# Altium PCB golden_arduino.PcbDoc
Units mil, origin at the board's own origin, x right, y up, seen from the top; angles counter-clockwise.
Board outline 3900 x 3000 mil, 2 copper layers (Top Layer, Bottom Layer); 61 components, 45 nets, 259 pads, 36 vias.
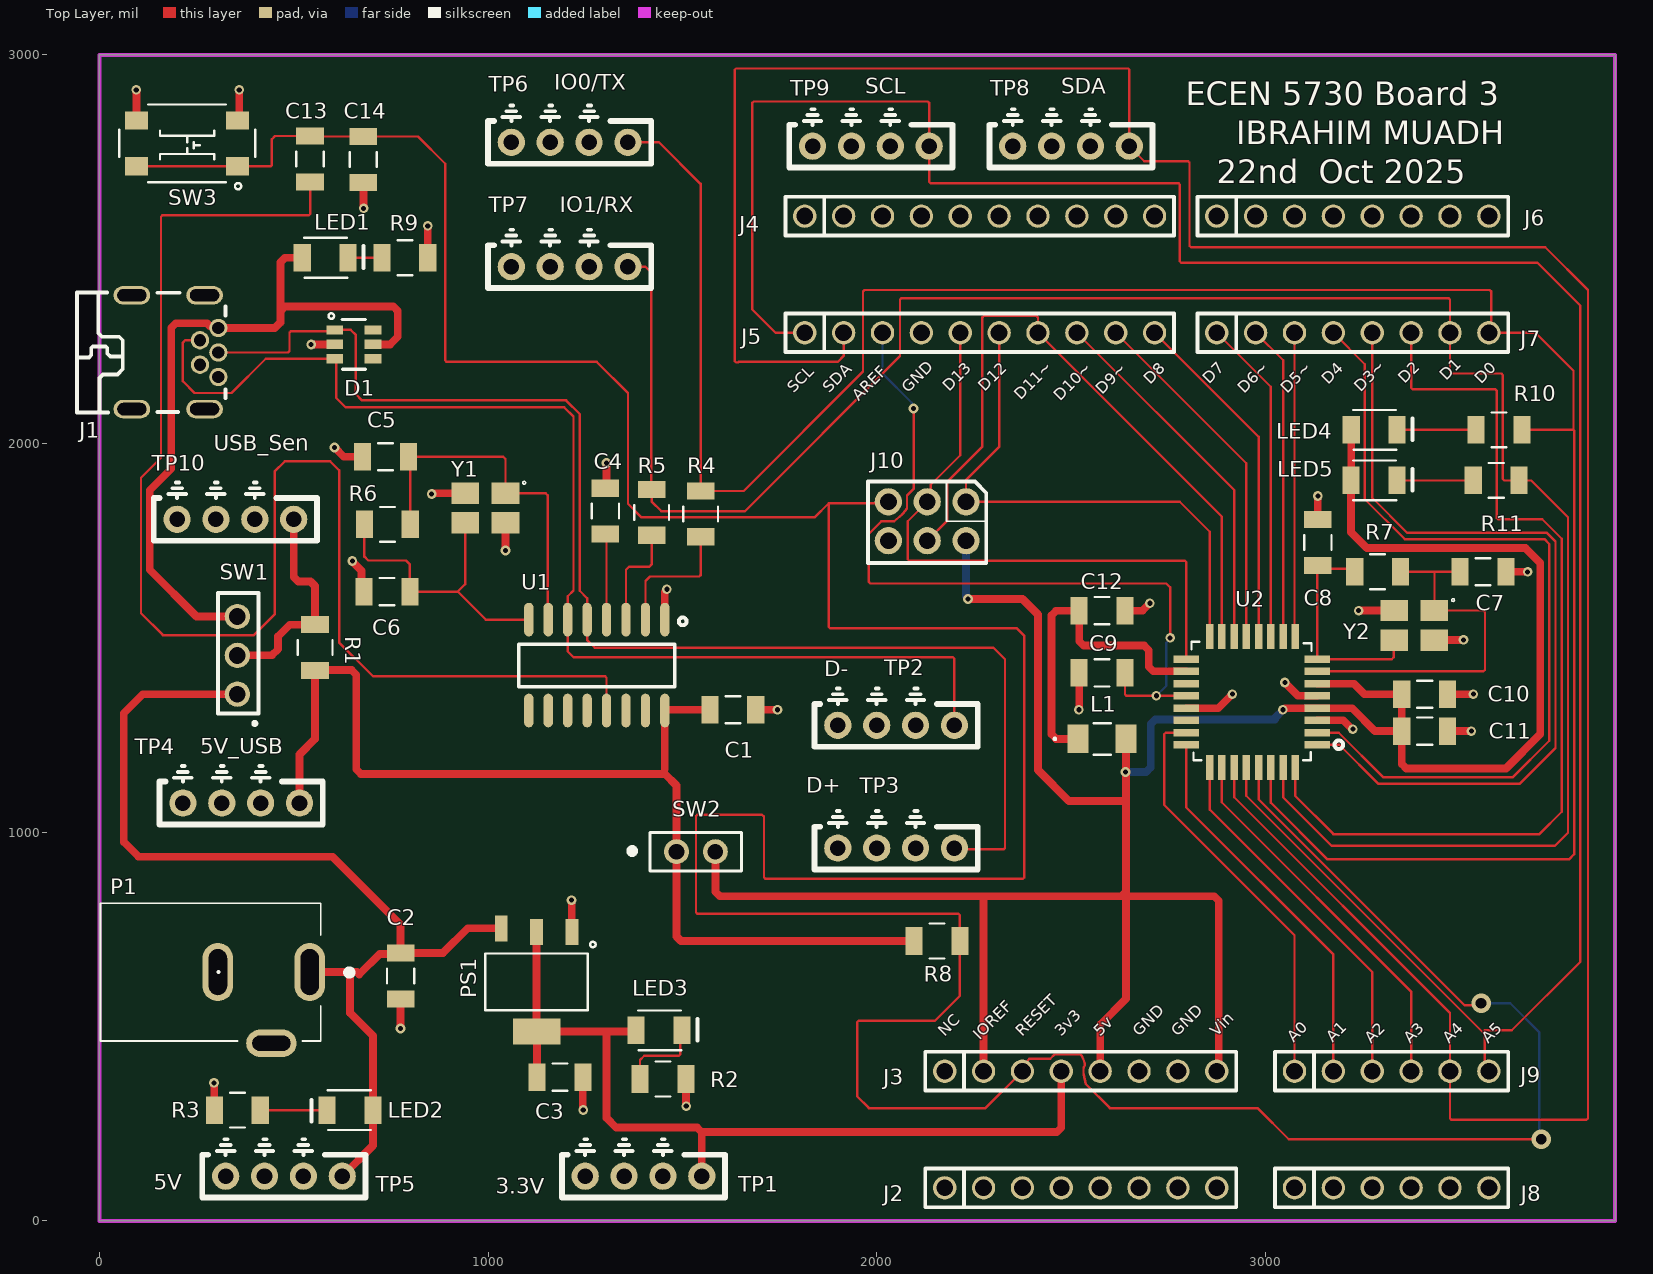
[diagram p0: Top Layer view]
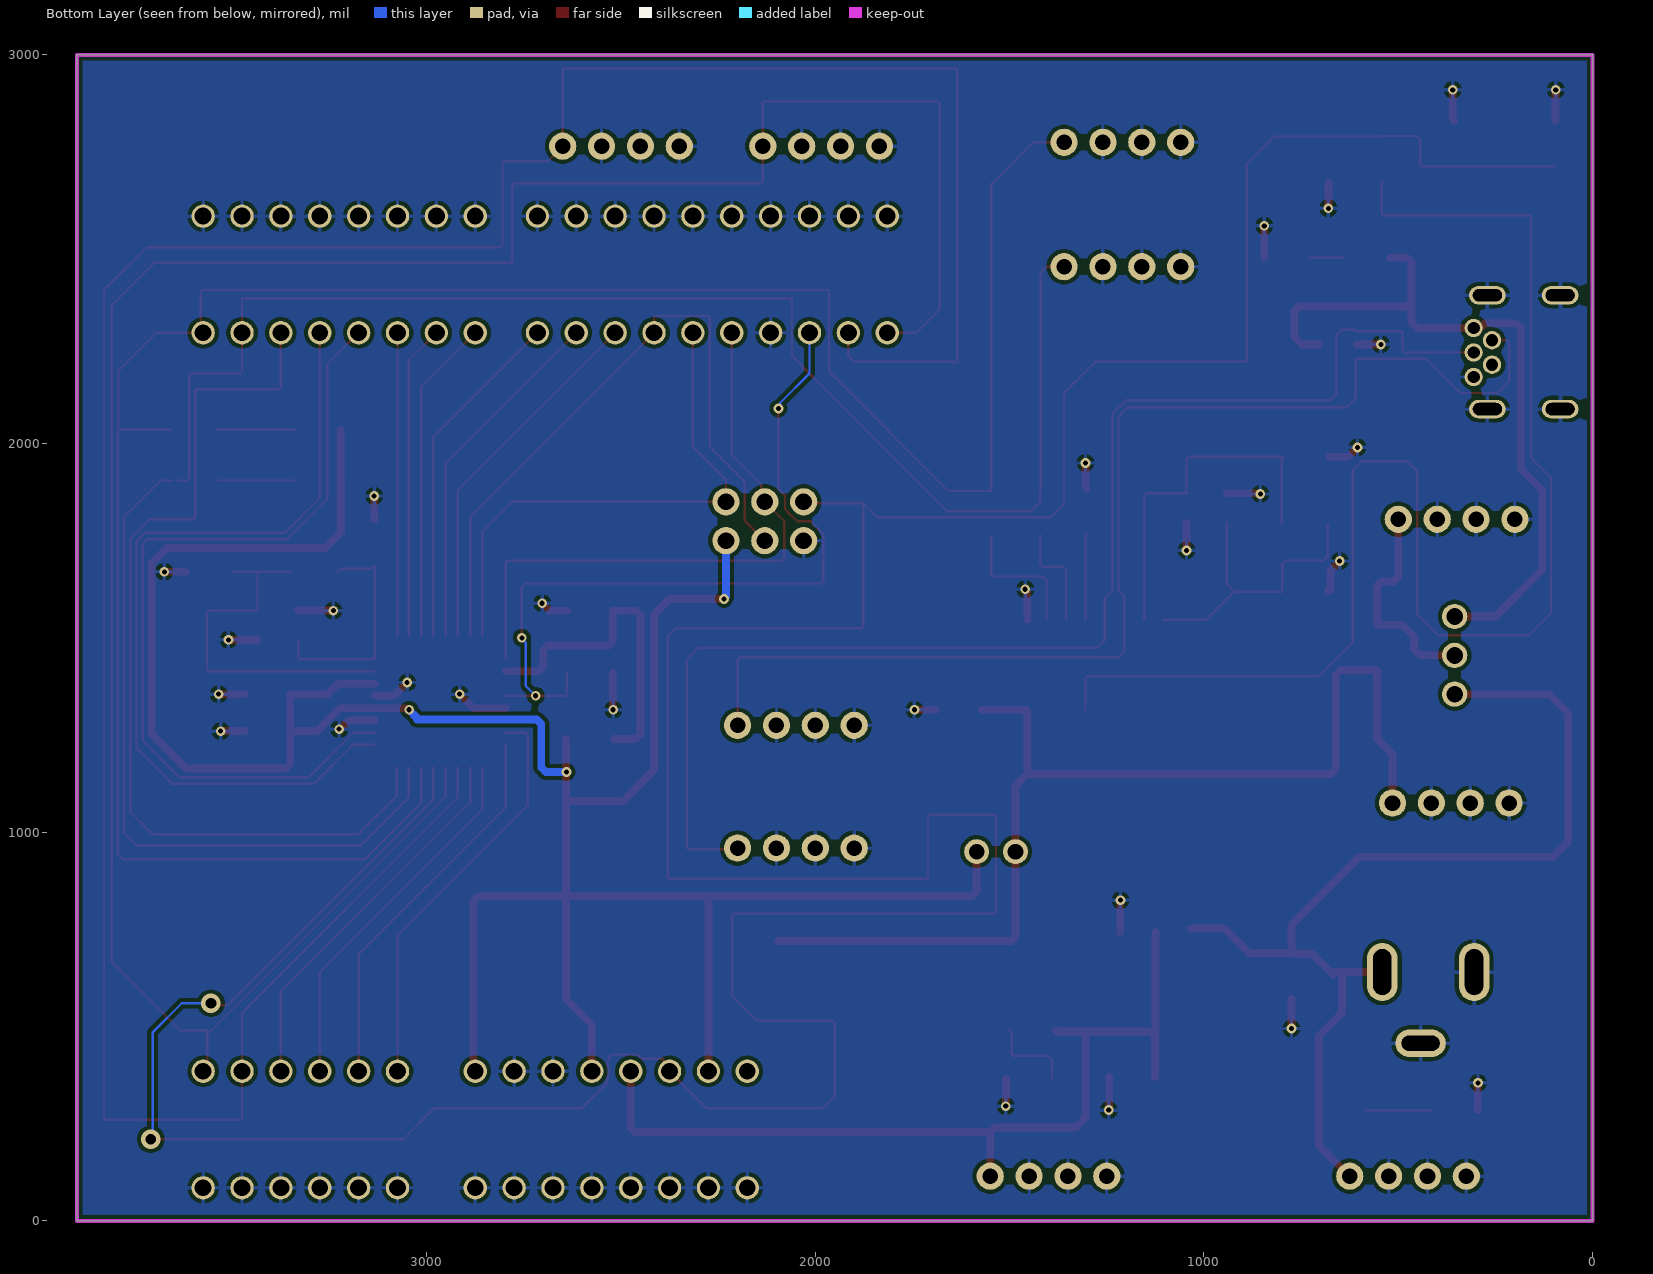
[diagram p1: Bottom Layer view, seen from below]
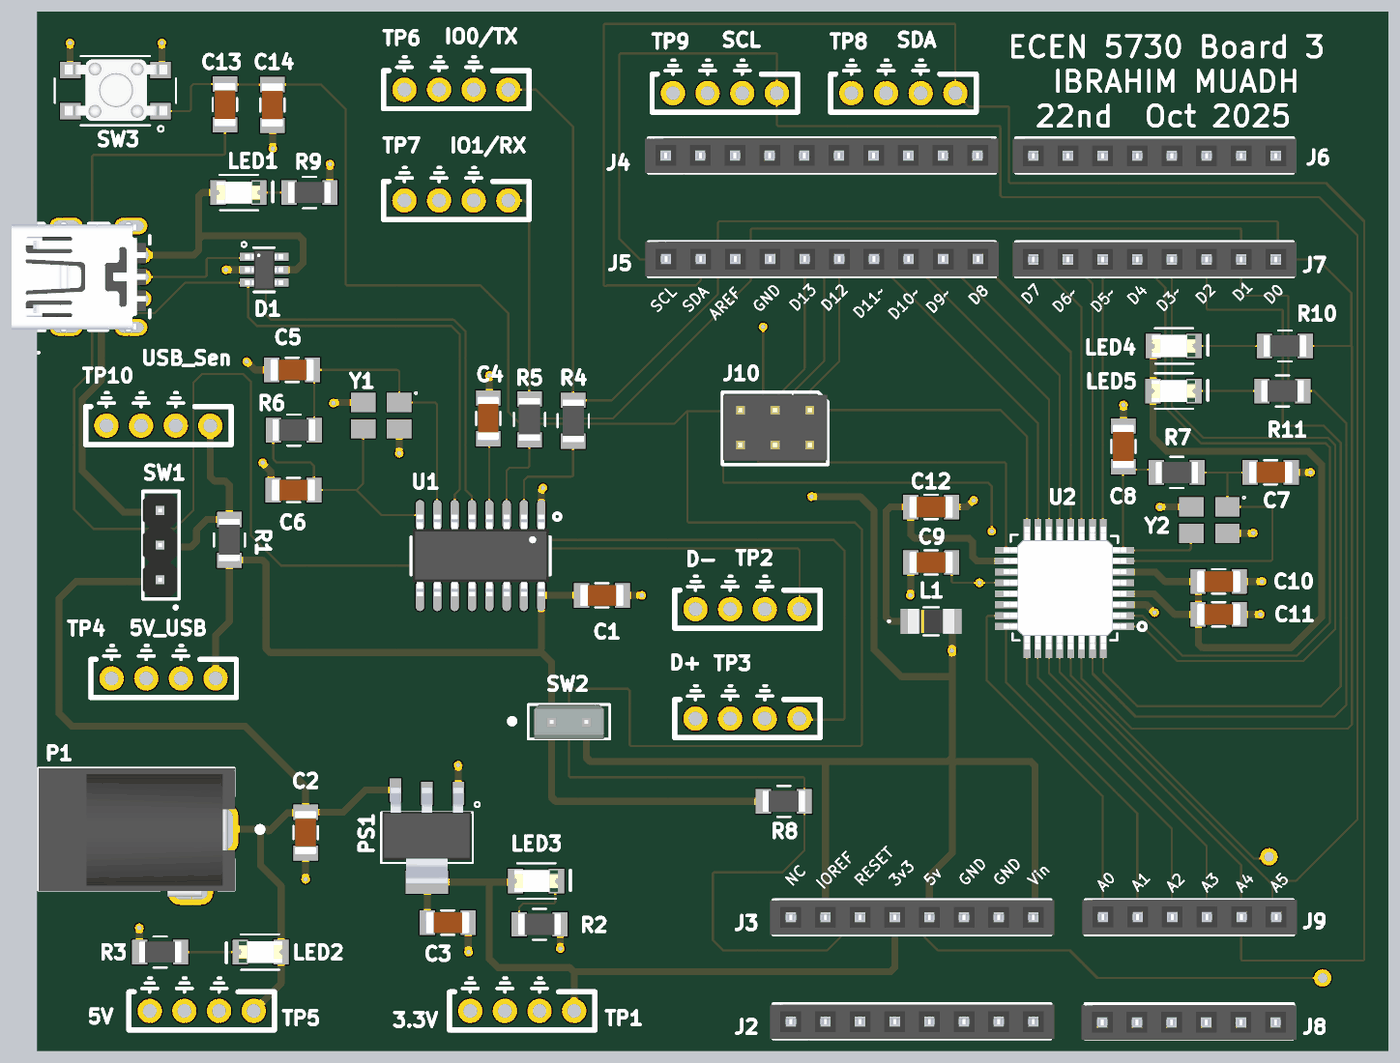
[diagram p2: 3D render of the assembled board from above, using the file's embedded part models]

## Layer stack, top to bottom
Top Solder: solder mask 0.4, Solder Resist, Dk 3.5
Top Layer: signal copper 1.4
Dielectric 1: dielectric 12.6, FR-4, Dk 4.8
Bottom Layer: signal copper 1.4
Bottom Solder: solder mask 0.4, Solder Resist, Dk 3.5

## Board outline
0,0 3900,0 3900,3000 0,3000

## Design rules (kind name [scope] priority, off if disabled: settings)
Clearance [All] p1: gap=10 ignorepadtopadclearanceinfootprint=FALSE
PolygonConnect [All] p1: connectstyle=Relief reliefconductorwidth=10 reliefentries=4 polygonreliefangle="90 Angle" airgapwidth=10
RoutingVias [All] p1: holewidth=28 width=50 viastyle="Through Hole" minholewidth=28 minwidth=50 maxholewidth=28 maxwidth=50
SolderMaskExpansion [All] p1: expansion=4 istentingtop=FALSE
SupplyNets "Schematic Supply Nets_6" [InNet('+5/USB')] p1: voltage=0.000
SupplyNets "Schematic Supply Nets_5" [InNet('+5')] p2: voltage=0.000
SupplyNets "Schematic Supply Nets_3" [InNet('+3V3')] p3: voltage=0.000
SupplyNets "Schematic Supply Nets_2" [InNet('USB_VCC')] p4: voltage=0.000
SupplyNets "Schematic Supply Nets_1" [InNet('ARD_PWR')] p5: voltage=0.000
SupplyNets "Schematic Supply Nets" [InNet('GND')] p6: voltage=0.000
Width "Schematic Width Constraint_7" [InNet('GND')] p1: maxlimit=20 minlimit=20 preferedwidth=20 minimp=50.000000 maximp=50.000000 favimp=50.000000
Width "Schematic Width Constraint_6" [InNet('NetC12_1')] p2: maxlimit=20 minlimit=20 preferedwidth=20 minimp=50.000000 maximp=50.000000 favimp=50.000000
Width "Schematic Width Constraint_5" [InNet('ARD_PWR')] p3: maxlimit=20 minlimit=20 preferedwidth=20 minimp=50.000000 maximp=50.000000 favimp=50.000000
Width "Schematic Width Constraint_4" [InNet('+5')] p4: maxlimit=20 minlimit=20 preferedwidth=20 minimp=50.000000 maximp=50.000000 favimp=50.000000
Width "Schematic Width Constraint_3" [InNet('+3V3')] p5: maxlimit=20 minlimit=20 preferedwidth=20 minimp=50.000000 maximp=50.000000 favimp=50.000000
Width "Schematic Width Constraint_2" [InNet('USB_VCC')] p6: maxlimit=20 minlimit=20 preferedwidth=20 minimp=50.000000 maximp=50.000000 favimp=50.000000
Width "Schematic Width Constraint_1" [InNet('NetR1_1')] p7: maxlimit=20 minlimit=20 preferedwidth=20 minimp=50.000000 maximp=50.000000 favimp=50.000000
Width "Schematic Width Constraint" [InNet('+5/USB')] p8: maxlimit=20 minlimit=20 preferedwidth=20 minimp=50.000000 maximp=50.000000 favimp=50.000000
Width [All] p9: maxlimit=6 minlimit=6 preferedwidth=6 minimp=50.000000 maximp=50.000000 favimp=50.000000
30 further rules are at their usual default settings.

## Components (designator, comment, footprint, x,y, rotation, side; value= is the part's Value field where it differs from the comment)
C1 "22uF" 1206_Passive_Capacitor 1630,1315 r0 top
C2 "22uF" 1206_Passive_Capacitor 775,630 r90 top
C3 "22uF" 1206_Passive_Capacitor 1185,370 r180 top
C4 "22uF" 1206_Passive_Capacitor 1302,1826 r90 top
C5 "22pF" 1206_Passive_Capacitor 736,1966 r0 top
C6 "22pF" 1206_Passive_Capacitor 740,1619 r0 top
C7 "22pF" 1206_Passive_Capacitor 3560,1670 r180 top
C8 "22pF" 1206_Passive_Capacitor 3135,1745 r270 top
C9 "22uF" 1206_Passive_Capacitor 2580,1410 r180 top
C10 "22uF" 1206_Passive_Capacitor 3410,1355 r0 top
C11 "22uF" 1206_Passive_Capacitor 3410,1260 r0 top
C12 "22uF" 1206_Passive_Capacitor 2580,1570 r0 top
C13 "1uF" 1206_Passive_Capacitor 542,2732 r90 top
C14 "47nF" 1206_Passive_Capacitor 679,2731 r90 top
D1 "TESD5V0V4UCX6" "TVS - TESD" 655,2255 r0 top value="TVS DIODE 5.5V 6TSOP"
J1 "USB Mini" USB_MINI_B 195,2235 r270 top value="USB mini B"
J2 "PPTC081LFBN-RC" "8_PIN_100MIL - Female" 2175,85 r0 top value=Female
J3 "PPTC081LFBN-RC" 8_PIN_ARD-PWR_100MIL 2175,385 r0 top value=Female
J4 "PPTC101LFBN-RC" "10_PIN_100MIL - Female" 1815,2585 r0 top value=Female
J5 "PPTC101LFBN-RC" 10_PIN_ARDUINO_100MIL 1815,2285 r0 top value=Female
J6 "PPTC081LFBN-RC" "8_PIN_100MIL - Female" 2875,2585 r0 top value=Female
J7 "PPTC081LFBN-RC" 8_PIN_ARD-DIG_100MIL 2875,2285 r0 top value=Female
J8 "PPTC061LFBN-RC" "6_PIN_100MIL -Female" 3075,85 r0 top value=Female
J9 "PPTC061LFBN-RC" 6_PIN_ARD-Analog_100mil 3075,385 r0 top value=Female
J10 "NRPN032PAEN-RC" ICSP 2230,1850 r270 top
L1 "FB_10uH_1206" AIML-1206_ABR-M 2580,1240 r0 top
LED1 "Red" LED_1206 581,2478 r0 top
LED2 "Red" LED_1206 645,285 r180 top
LED3 "Red" LED_1206 1440,490 r0 top
LED4 "Red" LED_1206 3280,2035 r0 top
LED5 "Red" LED_1206 3279.53,1905 r0 top
P1 "Power Jack" Power_Jack 541.22,640 r180 top value="CONN PWR JACK 2X5.5MM SOLDER"
PS1 "AMS1117-3.3" LDO 1125,615 r180 top value="IC REG LINEAR 3.3V 800MA SOT223"
R1 "500m" 1206_Passive_Resitor 555,1475 r270 top value=500mOhm
R2 "1k" 1206_Passive_Resitor 1450,365 r180 top value="1K Ohm"
R3 "1k" 1206_Passive_Resitor 355,285 r0 top value="1K Ohm"
R4 "1k" 1206_Passive_Resitor 1547,1819 r270 top value="1K Ohm"
R5 "1k" 1206_Passive_Resitor 1421,1823 r270 top value="1K Ohm"
R6 "1M" 1206_Passive_Resitor 741,1792 r180 top value="1M Ohm"
R7 "1M" 1206_Passive_Resitor 3289,1670 r180 top value="1M Ohm"
R8 "10k" 1206_Passive_Resitor 2155,720 r180 top value=10KOhm
R9 "1k" 1206_Passive_Resitor 786,2478 r0 top value="1K Ohm"
R10 "1k" 1206_Passive_Resitor 3601,2035 r0 top value="1K Ohm"
R11 "1k" 1206_Passive_Resitor 3594,1905 r0 top value="1K Ohm"
SW1 "PREC003SAAN-RC" 3_PIN_100mil 355,1355 r90 top value="CONN HEADER VERT 3POS 2.54MM"
SW2 "SW_2Pin_100mil_Switch" 2Pin-Header-Conn 1485,950 r0 top
SW3 "TL3305AF160QG" Switch_JLC 225.92,2772.06 r180 top
TP1 "10x Probe TP" TP10x_Probe 1400,115 r180 top
TP2 "10x Probe TP" TP10x_Probe 2050,1275 r180 top
TP3 "10x Probe TP" TP10x_Probe 2050,959.1 r180 top
TP4 "10x Probe TP" TP10x_Probe 365,1075 r180 top
TP5 "10x Probe TP" TP10x_Probe 475,115 r180 top
TP6 "10x Probe TP" TP10x_Probe 1210,2775 r180 top
TP7 "10x Probe TP" TP10x_Probe 1210,2455 r180 top
TP8 "10x Probe TP" TP10x_Probe 2500,2765 r180 top
TP9 "10x Probe TP" TP10x_Probe 1985,2765 r180 top
TP10 "10x Probe TP" TP10x_Probe 350,1805 r180 top
U1 "CH340G" "USB to serial" 1280,1430 r180 top value="USB to Serial"
U2 "ATMEGA328P-ANR" ATMega328P 2965,1335 r0 top value="IC MCU 8BIT 32KB FLASH 32TQFP"
Y1 "X322512MSB4SI" "Crystal resonator" 993,1832 r180 top value=12MHz
Y2 "X322516MLB4SI" "Crystal resonator" 3383.03,1530.16 r180 top value=16MHz

## Footprints (in the part's own frame and the unit in brackets; to place one, negate y for a bottom-side part, rotate by r counter-clockwise, add the part's x,y. Pads: shape width x height; smd on the part's side, far side on the other; paste and mask are expansions set on the pad)
2Pin-Header-Conn [mm]
  round 1.62 hole 1.02: 1(0,0) 2(2.54,0)
  silkscreen extent -3.02,-1.27 4.26,1.26, body extent -1.27,-1.27 3.81,1.27, height 8.13
3_PIN_100mil [mm]
  round 1.65 hole 1.1: 1(0,0) 2(2.54,0) 3(5.08,0)
  silkscreen extent -2,-1.4 6.6,1.27, body extent -1.14,-1.27 6.48,1.27, height 8.38
"6_PIN_100MIL -Female" [mil]
  round 60 hole 43.31: 1(0,0) 2(100,0) 3(200,0) 4(300,0) 5(400,0) 6(500,0)
  silkscreen extent -50,-50 550,50, body extent -61,-53 559,47, height 335
6_PIN_ARD-Analog_100mil [mil]
  round 60 hole 43.31: 1(0,0) 2(100,0) 3(200,0) 4(300,0) 5(400,0) 6(500,0)
  silkscreen extent -50,-50 550,50, body extent -59,-49 561,51, height 335
"8_PIN_100MIL - Female" [mil]
  round 60 hole 43.31: 1(0,0) 2(100,0) 3(200,0) 4(300,0) 5(400,0) 6(500,0) 7(600,0) 8(700,0)
  silkscreen extent -50,-50 750,50, body extent -60,-51 760,49, height 335
8_PIN_ARD-DIG_100MIL [mil]
  round 60 hole 43.31: 1(0,0) 2(100,0) 3(200,0) 4(300,0) 5(400,0) 6(500,0) 7(600,0) 8(700,0)
  silkscreen extent -50,-50 750,50, body extent -60,-50 760,50, height 335
8_PIN_ARD-PWR_100MIL [mil]
  round 60 hole 43.31: 1(0,0) 2(100,0) 3(200,0) 4(300,0) 5(400,0) 6(500,0) 7(600,0) 8(700,0)
  silkscreen extent -50,-50 750,50, body extent -60,-50 760,50, height 335
"10_PIN_100MIL - Female" [mil]
  round 60 hole 43.31: 1(0,0) 2(100,0) 3(200,0) 4(300,0) 5(400,0) 6(500,0) 7(600,0) 8(700,0) 9(800,0) 10(900,0)
  silkscreen extent -50,-50 950,50, body extent -61,-50 959,50, height 335
10_PIN_ARDUINO_100MIL [mil]
  round 60 hole 43.31: 1(0,0) 2(100,0) 3(200,0) 4(300,0) 5(400,0) 6(500,0) 7(600,0) 8(700,0) 9(800,0) 10(900,0)
  silkscreen extent -50,-50 950,50, body extent -60,-49 960,51, height 335
1206_Passive_Capacitor [mil]
  rect 44x71 smd: 1(-59,0) 2(59,0)
  silkscreen extent -19,-35 19,35, body extent -63,-31 63,32, height 50
1206_Passive_Resitor [mil]
  rect 44x71 smd: 1(-59,0) 2(59,0)
  silkscreen extent -19,-45 19,45, body extent -61,-31 61,31, height 26
AIML-1206_ABR-M [mil]
  rect 54x73 smd paste+0 mask+0: 1(-61.5,0) 2(61.5,0)
  silkscreen extent -124,-40 22,40, body extent -66,-36 66,36, height 55
ATMega328P [mm]
  rect 1.65x0.508 smd mask+0.025: 1(4.28,-2.794) 2(4.28,-2.007) 3(4.28,-1.194) 4(4.28,-0.406) 5(4.28,0.406) 6(4.28,1.194) 7(4.28,2.007) 8(4.28,2.794) 17(-4.28,2.794) 18(-4.28,2.007) 19(-4.28,1.194) 20(-4.28,0.406) 21(-4.28,-0.406) 22(-4.28,-1.194) 23(-4.28,-2.007) 24(-4.28,-2.794)
  rect 0.508x1.65 smd mask+0.025: 9(2.843,4.28) 10(2.056,4.28) 11(1.243,4.28) 12(0.455,4.28) 13(-0.357,4.28) 14(-1.145,4.28) 15(-1.958,4.28) 16(-2.745,4.28) 25(-2.745,-4.28) 26(-1.958,-4.28) 27(-1.145,-4.28) 28(-0.357,-4.28) 29(0.455,-4.28) 30(1.243,-4.28) 31(2.056,-4.28) 32(2.843,-4.28)
  silkscreen extent -3.94,-3.81 5.97,3.94, body extent -4.45,-4.47 4.55,4.53, height 1.16
"Crystal resonator" [mm]
  rect 1.8x1.4 smd: 1(-1.32,-1.02) 2(1.32,-1.02) 3(1.32,0.92) 4(-1.32,0.92)
  silkscreen extent -2.63,-1.79 -2.45,-1.61, body extent -1.65,-1.2 1.65,1.2, height 0.8
ICSP [mil]
  round 70 hole 43.31: 1(0,0) 2(0,-100) 3(0,-200) 4(100,0) 5(100,-100) 6(100,-200)
  silkscreen extent -52,-252 157,52, body extent -44,-250 146,50, height 330
LDO [mm]
  rect 0.838x1.7 smd: 1(-2.311,-3.25) 2(0,-3.25) 3(2.311,-3.5)
  rect 3.099x1.7 smd: 4(0,3.25)
  silkscreen extent -3.86,-2.62 3.35,1.85, body extent -3.25,-3.65 3.25,3.35, height 1.85
LED_1206 [mil]
  rect 44x71 smd: 1(-59,0) 2(59,0)
  silkscreen extent -54,-51 99,51, body extent -63,-31 63,31, height 28
Power_Jack [mm]
  oval 2x3.8 hole 1.2 slot 3 at 90 deg: 1(0,0) 2(6,0)
  oval 3.3x1.8 hole 1 slot 2.5 at 0 deg: 3(2.5,4.65)
  silkscreen extent -2.79,-4.5 13.68,4.5, body extent -0.76,-4.45 13.64,4.95, height 11.49
Switch_JLC [mm]
  rect 1.5x1.2 smd: 1(-3.3,1.5) 2(3.3,1.5) 3(-3.3,-1.5) 4(3.3,-1.5)
  silkscreen extent -4.44,-2.54 4.45,3, body extent -3.8,-2.29 3.7,2.21, height 3.7
TP10x_Probe [mil] "Small Probs footprint"
  round 70 hole 40: 1(-150,0) 2(-50,0) 2(50,0) 2(150,0)
  silkscreen extent -210,-95 210,55
"TVS - TESD" [mil] "TVS DIODE 5VWM 15VC SOT26"
  rect 43x24 smd mask+3: 1(-49,37) 2(-49,0) 3(-49,-37) 4(49,-37) 5(49,0) 6(49,37)
  silkscreen extent -65,-64 30,80, body extent -55,-57 55,57, height 57
"USB to serial" [mil]
  oval 24x86.61 smd: 1(-175,-117) 2(-125,-117) 3(-75,-117) 4(-25,-117) 5(25,-117) 6(75,-117) 7(125,-117) 8(175,-117) 9(175,117) 10(125,117) 11(75,117) 12(25,117) 13(-25,117) 14(-75,117) 15(-125,117) 16(-175,117)
  silkscreen extent -231,-122 201,56, body extent -197,-118 197,118, height 71
USB_MINI_B [mm]
  round 1.2 hole 0.8: 1(-1.58,2.826) 2(-0.78,1.622) 3(0.02,2.826) 4(0.82,1.622) 5(1.62,2.826)
  oval 1.2x2.4 hole 0.8 slot 1.9 at 90 deg: 6(-3.72,1.924) 7(3.72,1.924) 8(-3.72,-2.826) 9(3.72,-2.826)
  silkscreen extent -3.89,-6.42 3.93,3.3, body extent -4.04,-6.83 4.06,3.02, height 3.98

## Part data
C1 C2 C3 C4 C9 C10 C11 C12: library part C_22uF_1206, "22uF ±10% 25V X5R 1206 Multilayer Ceramic Capacitors MLCC - SMD/SMT RoHS", LCSC Part#=C12891, MFR Part #=CL31A226KAHNNNE, Datasheet=https://datasheet.lcsc.com/lcsc/1811031514_Samsung-Electro-Mechanics-CL31A226KAHNNNE_C12891.pdf, Type=basic
C5 C6 C7 C8: library part C_22pF_1206, "22pF ±5% 1kV C0G 1206 Multilayer Ceramic Capacitors MLCC - SMD/SMT RoHS", LCSC Part#=C107174, MFR Part #=CC1206JKNPOCBN220, Datasheet=https://datasheet.lcsc.com/lcsc/1810241219_YAGEO-CC1206JKNPOCBN220_C107174.pdf, Type=Extended
C13: library part C_1uF_1206, "MULTILAYER CERAMIC CAPACITORS MLCC - SMD/SMT 1UF 50V 1206 ROHS", LCSC Part#=C1848, MFR Part #=CL31B105KBHNNNE, Digikey Link=https://www.digikey.com/product-detail/en/C1206C105M4RACTU/399-8150-1-ND/3471873/?itemSeq=304982366, Type=Basic
C14: library part C_47nF_1206, "47nF ±5% 50V C0G 1206 Multilayer Ceramic Capacitors MLCC - SMD/SMT RoHS", LCSC Part#=C21812, MFR Part #=GRM31M5C1H473JA01L, Datasheet=https://datasheet.lcsc.com/lcsc/1810201313_Murata-Electronics-GRM31M5C1H473JA01L_C21812.pdf, Type=Extended
D1: library part D_TVS_Diode_TESD, "TVS SOT-23 ROHS", LCSC Part#=C5289077, Datasheet=https://www.lcsc.com/datasheet/C5289077.pdf, MFR Part #=TESD5V0V4UCX6, Type=Basic
J1: library part J_USB_B_Mini, "Through Hole USB Connectors RoHS", LCSC Part#=C46398, MFR Part #=920-462A2021D10102, Datasheet=https://datasheet.lcsc.com/szlcsc/2103081233_Jing-Extension-of-the-Electronic-Co-920-462A2021D10102_C46398.pdf, Type=Extended
J2 J6: library part JF_8_PIN_FEMALE, "8 Position Header Connector 0.100\" (2.54mm) Through Hole Tin", LCSC Part#=C27438, Digikey Link=https://www.digikey.com/product-detail/en/PPTC081LFBN-RC/S7006-ND/810147/?itemSeq=304982354, MFR Part #=PPTC081LFBN-RC, Type=Extended
J3: library part JF_8_PIN_FEMA_ARD-Pwr, "8 Position Header Connector 0.100\" (2.54mm) Through Hole Tin", LCSC Part#=C27438, Digikey Link=https://www.digikey.com/product-detail/en/PPTC081LFBN-RC/S7006-ND/810147/?itemSeq=304982354, MFR Part #=PPTC081LFBN-RC, Type=Extended
J4: library part JF_10_PIN_FEMALE_, "10 Position Header Connector 0.100\" (2.54mm) Through Hole Tin", LCSC Part#=C225507, Digikey Link=https://www.digikey.com/product-detail/en/PPTC101LFBN-RC/S7008-ND/810149/?itemSeq=304982352, MFR Part #=PPTC101LFBN-RC, Type=Extended
J5: library part JF_10_PIN_FEMA_ARDUINO, "10 Position Header Connector 0.100\" (2.54mm) Through Hole Tin", LCSC Part#=C225507, Digikey Link=https://www.digikey.com/product-detail/en/PPTC101LFBN-RC/S7008-ND/810149/?itemSeq=304982352, MFR Part #=PPTC101LFBN-RC, Type=Extended
J7: library part JF_8_PIN_FEMA_ARD-Dig, "8 Position Header Connector 0.100\" (2.54mm) Through Hole Tin", LCSC Part#=C27438, Digikey Link=https://www.digikey.com/product-detail/en/PPTC081LFBN-RC/S7006-ND/810147/?itemSeq=304982354, MFR Part #=PPTC081LFBN-RC, Type=Extended
J8: library part JF_6_PIN_FEMALE, "6 Position Header Connector 0.100\" (2.54mm) Through Hole Tin", LCSC Part#=C40877, Digikey Link=https://www.digikey.com/product-detail/en/PPTC061LFBN-RC/S7004-ND/810145/?itemSeq=304982353, MFR Part #=PPTC061LFBN-RC, Type=Extended
J9: library part JF_6_PIN_FEMA_ARD-Anolog, "6 Position Header Connector 0.100\" (2.54mm) Through Hole Tin", LCSC Part#=C40877, Digikey Link=https://www.digikey.com/product-detail/en/PPTC061LFBN-RC/S7004-ND/810145/?itemSeq=304982353, MFR Part #=PPTC061LFBN-RC, Type=Extended
J10: library part J_ICSP, "Connector Header Through Hole 6 position 0.079\" (2.00mm)", LCSC Part#=C124384, Digikey Link=https://www.digikey.com/product-detail/en/NRPN032PAEN-RC/S5801-03-ND/804955/?itemSeq=304982355, MFR Part #=NRPN032PAEN-RC, Type=Extended
L1: "25mA 10uH ±10% 800mΩ 1206  Inductors (SMD) ROHS", LCSC Part#=C1051, MFR Part #=CMI321609X100KT, Mfr_Name="FH (Guangdong Fenghua Advanced Tech)", Datasheet=https://datasheet.lcsc.com/lcsc/1810311314_FH--Guangdong-Fenghua-Advanced-Tech-CMI321609X100KT_C1051.pdf, Type=Basic
LED1 LED2 LED3 LED4 LED5: library part LED_RED_1206, "Red 621~631nm 1206 Light Emitting Diodes (LED) RoHS", LCSC Part#=C93133, MFR Part #=15-21/R6C-FQ1R1B/2T, Datasheet=https://datasheet.lcsc.com/szlcsc/1811151241_Everlight-Elec-15-21-R6C-FQ1R1B-2T_C93133.pdf, Type=Extended
P1: library part "P_Power Jack", "Power Barrel Connector Jack 2.10mm ID (0.083\"), 5.50mm OD (0.217\") Through Hole, Right Angle", LCSC Part#=C136744, MFR Part #=PJ-102A, Digikey Link=https://www.digikey.com/product-detail/en/PJ-102A/CP-102A-ND/275425/?itemSeq=304982367, Type=Extended
PS1: library part PS_AMS_LDO_3v3, "LOW DROPOUT REGULATORS(LDO) POSITIVE FIXED 1.3V @ 800MA 15V 3.3V 1A SOT-223 ROHS", LCSC Part#=C6186, MFR Part #=AMS1117-3.3, Type=Basic
R1: library part R_500mOhm_1206, "Resistors/Shunt 250mW 500mΩ ±800ppm/℃ ±5% 1206  Current Sense  Resistors ROHS", LCSC Part#=C247433, MFR Part #=1206W4J050KT5E, Datasheet=https://datasheet.lcsc.com/lcsc/1810301438_UNI-ROYAL-Uniroyal-Elec-1206W4J050KT5E_C247433.pdf, Type=Extended
R2 R3 R4 R5 R9 R10 R11: library part R_1K_1206, "CHIP RESISTOR - SURFACE MOUNT 1KOHMS ±1% 1/4W 1206 ROHS", LCSC Part#=C4410, MFR Part #=RNCP1206FTD1K00CT, Digikey Link=https://www.digikey.com/product-detail/en/RNCP1206FTD1K00/RNCP1206FTD1K00CT-ND/2240675/?itemSeq=304982373, Type=Basic
R6 R7: library part R_1M_1206, "CHIP RESISTOR - SURFACE MOUNT 1MOHMS ±1% 1/4W 1206 ROHS", LCSC Part#=C17927, MFR Part #=RMCF1206JT1M00, Digikey Link=https://www.digikey.com/product-detail/en/RMCF1206JT1M00/RMCF1206JT1M00CT-ND/1942830/?itemSeq=304982358, Type=Basic
R8: library part R_10KOhm_1206, "10 kOhms ±5% 0.25W, 1/4W Chip Resistor 1206 (3216 Metric) Automotive AEC-Q200 Thick Film", LCSC Part#=C17902, MFR Part #=RMCF1206FT10K0, Digikey Link=https://www.digikey.com/en/products/detail/stackpole-electronics-inc/RMCF1206FT10K0/1759669, Type=Basic
SW1: library part SW_3Pin_100mil_Switch, "Connector Header Through Hole 3 position 0.100\" (2.54mm)", LCSC Part#=C49257, Digikey Link=https://www.digikey.com/product-detail/en/PREC003SAAN-RC/S1012EC-03-ND/2774851/?itemSeq=304982371, MFR Part #=PREC003SAAN-RC, Type=Extended
SW2: "2Pin Header", LCSC Part#=C124375, Type=Extended
SW3: library part SW_Push_Button_JLC, "Tactile Switch SPST-NO Top Actuated Surface Mount", LCSC Part#=C2837550, MFR Part #=KH-4.5X4.5X4.3H-STM, Datasheet=https://datasheet.lcsc.com/lcsc/2106081532_Shenzhen-Kinghelm-Elec-KH-4.5X4.5X4.3H-STM_C2837550.pdf, Type=Extended
TP1 TP2 TP3 TP4 TP5 TP6 TP7 TP8 TP9 TP10: library part TP_10x_Probe, "Test Point 300 mil centers"
U1: library part U_USBtoSerial, "Transceiver USB 2.0 2Mbps SOP-16_150mil USB ICs RoHS", LCSC Part#=C14267, Datasheet=https://datasheet.lcsc.com/lcsc/2008191806_WCH-Jiangsu-Qin-Heng-CH340G_C14267.pdf, MFR Part #=CH340G, Type=Basic
U2: library part U_ATMega328P, "AVR AVR® ATmega Microcontroller IC 8-Bit 20MHz 32KB (16K x 16) FLASH 32-TQFP (7x7)", LCSC Part#=C14877, MFR Part #=ATMEGA328P-AU, Digikey Link=https://www.digikey.com/product-detail/en/ATMEGA328P-ANR/ATMEGA328P-ANRCT-ND/2774230/?itemSeq=304982365, Type=Basic
Y1: library part X_12MHz_Res, "SMD Crystal Resonators 12MHz ±10ppm SMD-3225_4P RoHS", LCSC Part#=C9002, Datasheet=https://datasheet.lcsc.com/szlcsc/Yangxing-Tech-X322512MSB4SI_C9002.pdf, MFR Part #=X322512MSB4SI, Type=Basic
Y2: library part X_16Mhz_Res, "±10ppm 16000000Hz -40℃~85℃ 贴片无源晶振 60Ω 9pF SMD3225-4P Crystals ROHS", LCSC Part#=C13738, MFR Part #=X322516MLB4SI, Type=Basic

## Via types
v1: diameter 25, hole 13, Top Layer to Bottom Layer, 34 vias
v2: diameter 50, hole 28, Top Layer to Bottom Layer, 2 vias

## Nets (pads, with @x,y where several pads share a name; then routed paths per layer and width w, separated by ;. In a path a pad name is that pad's centre, name@x,y a point inside that pad or via, vN(x,y) a via of type N, cw(c..) or ccw(c..) an arc to the next point about the centre after c; other vN are vias at no path point)
+3V3: C3.2 J3.4 LED3.1 PS1.2 PS1.4 TP1.1 | length 2301.8
  Top Layer w20: PS1.2 PS1.4 ; C3.2 1126,486.05 PS1.4 ; LED3.1 1378.05,487.05 1302.95,487.05 ; TP1.1 1550,228.28 ; J3.4 2475,240 2463.28,228.28 1550,228.28 ; PS1.4 1302.95,487.05 ; 1302.95,487.05 1305,485 1305,265 1330,240 1538.28,240 1550,228.28
+5: C2.2 LED2.1 P1.1 PS1.3 SW1.1 TP5.1 | length 2639.8
  Top Layer w20: SW1.1 112,1355 63,1306 63,975 101,937 600,937 775,762 C2.2 884,689 947.8,752.8 PS1.3 ; P1.1 645,640 ; TP5.1 704,194 LED2.1 704,476 645,535 645,640 ; C2.2@772.69,686.69 721.22,686.69 668.67,634.14 662.81,640 645,640
+5/USB: C1.1 R1.2 R8.2 SW2.1 TP4.1 U1.16 | length 2825.9
  Top Layer w20: TP4.1 515,1200 555,1240 R1.2 556,1417 649.28,1417 661,1405.28 661,1161.72 672.72,1150 1455,1150 1485,1120 SW2.1 1485,731.72 1496.72,720 R8.2 ; 1455,1161.72 U1.16 ; U1.16@1455,1313.15 1456.85,1315 C1.1
A0: J9.1 U2.23 | length 1064.2
  Top Layer w6: U2.23 2743.51,1256 2740,1252.49 2740,1070 3075,735 J9.1
A1: J9.2 U2.24 | length 996.8
  Top Layer w6: U2.24 2796.5,1063.5 3175,685 J9.2
A2: J9.3 U2.25 | length 954.7
  Top Layer w6: U2.25 2856.93,1058.07 3275,640 J9.3
A3: J9.4 U2.26 | length 983.2
  Top Layer w6: U2.26 2887.93,1077.07 3375,590 J9.4
ARD_PWR: C10.1 C11.1 J3.2 J3.5 J3.8 J10.4 L1.2 LED4.1 LED5.1 SW2.2 U2.4 U2.6 | length 7098.6
  Top Layer w20: SW2.2 1585,846.72 1596.72,835 2275,835 ; v1(2235,1600) 2375,1600 2415,1560 2415,1160 2495,1080 2641.5,1080 ; J3.2 2275,835 ; J3.5 2575,505 2641.5,571.5 2641.5,835 ; L1.2 2641.5,1080 ; J3.8 2880,390 2880,823.28 2868.28,835 2641.5,835 ; v1(3045,1315) 3046.35,1315 3050.35,1319 U2.4 3223.28,1319 3282.28,1260 C11.1 ; U2.6 3228,1382 3255,1355 C10.1@3343,1355 ; LED4.1 3220.76,2034.76 3220.76,1905.24 LED5.1 3220.53,1771.72 3261.24,1731 3669,1731 3707.5,1692.5 3707.5,1252.5 3619,1164 3362.72,1164 3351,1175.72 C11.1 ; C10.1 C11.1 ; 2275,835 2629.78,835 ; 2629.78,835 2641.5,846.72 ; 2629.78,835 2641.5,835 ; 2641.5,835 2641.5,846.72 ; 2641.5,846.72 2641.5,1080
  Bottom Layer w20: J10.4 2230,1606.35 2235,1601.35 v1(2235,1600) ; v1(2640,1155) 2693.28,1155 2705,1166.72 2705,1278.28 2716.72,1290 3025,1290 3025,1293.65 3045,1313.65 v1(3045,1315)
AREF: C9.1 J5.3 U2.20 | length 2030.4
  Top Layer w6: v1(2095,2090) 2095,1882.88 2078,1865.88 2078,1833 2067.37,1819.88 cw(c2030,1850) 2060.75,1813.15 2045,1800 2042.51,1800 2012.12,1800 1980,1767.88 1980,1643.51 1983.51,1640 2745,1640 2755,1630 v1(2755,1500) ; C9.1 2639,1354.51 2642.51,1351 v1(2719.51,1351) U2.20
  Bottom Layer w6: J5.3 2015,2180 2090,2105 2090,2095 v1(2095,2090) ; v1(2719.51,1351) 2745,1376.49 2745,1486.99 2755,1496.99 v1(2755,1500)
D+: D1.1 J1.3 TP3.1 U1.5 | length 3463.4
  Top Layer w6: J1.3 485.79,2234.22 489.3,2237.73 489.3,2285.49 492.82,2289 605.83,2289 609.23,2292.4 646.6,2292.4 660,2279 660,2127 676,2111 1201,2111 1236,2076 1236,1621 1255,1602 U1.5 1255,1494.69 1274.85,1474.85 2300.15,1474.85 2330,1445 2330,959.32 2326.49,955.81 2203.61,955.81 TP3.1@2200.32,959.1
D-: D1.3 J1.2 TP2.1 U1.6 | length 3101.5
  Top Layer w6: J1.2 220.71,2265.72 215,2260 215,2160 245,2130 340,2130 428,2218 D1.3 ; D1.3@609.23,2217.6 609.23,2117.77 634,2093 1196.37,2093 1220,2069.37 1220,1622 1205,1607 U1.6 1205,1464.93 1219.93,1450 2196.49,1450 2200,1446.49 TP2.1
DTR: C13.1 U1.13 | length 3707.5
  Top Layer w6: C13.1 542.5,2672.5 542.5,2590.51 538.99,2587 162.03,2587 158.51,2583.49 158.51,1963.51 107,1912 107,1563.51 163.51,1507 398,1507 451,1560 451,1928 477,1954 594,1954 617,1931 617,1488 704,1401 1301.49,1401 1305,1397.49 U1.13
GND: C1.2 C2.1 C3.1 C4.2 C5.1 C6.1 C7.1 C8.1 C9.2 C10.2 C11.2 C12.2 C14.1 D1.2 J1.5 J1.6 J1.7 J1.8 J1.9 J2.1 J2.2 J2.3 J2.4 J2.5 J2.6 J2.7 J2.8 J3.6 J3.7 J4.1 J4.2 J4.3 J4.4 J4.5 J4.6 J4.7 J4.8 J4.9 J4.10 J5.4 J6.1 J6.2 J6.3 J6.4 J6.5 J6.6 J6.7 J6.8 J8.1 J8.2 J8.3 J8.4 J8.5 J8.6 J10.6 P1.2 P1.3 PS1.1 R2.1 R3.1 R9.2 SW3.3 SW3.4 TP1.2 TP2.2 TP3.2 TP4.2 TP5.2 TP6.2 TP7.2 TP8.2 TP9.2 TP10.2 U1.1 U2.3 U2.5 U2.21 Y1.2 Y1.4 Y2.2 Y2.4 | length 2195.2
  Top Layer w20: v1(95,2910) 95.5,2909.5 95.5,2831.61 SW3.4 ; v1(295,355) 295.5,354.5 295.5,285.5 R3.1 ; SW3.3 360,2835.27 v1@360,2908.65 ; v1(545,2255) D1.2 ; v1(605,1990) 629,1966 C5.1 ; v1(650.93,1697.75) 650.93,1696.39 674.7,1672.62 674.7,1625.3 C6.1 ; C14.1 680,2671 v1(680,2605) ; v1(775,495) C2.1 ; R9.2 v1(845,2560) ; v1(855,1870) 856.35,1870 858.51,1872.16 Y1.2 ; v1(1045,1725) Y1.4 ; v1(1215,825) 1215.5,824.5 1215.5,743.45 PS1.1 ; C3.1 1244,287.35 1245,286.35 v1(1245,285) ; C4.2 1305,1888 v1@1305,1948.65 ; U1.1 1455,1618.65 1460,1623.65 v1(1460,1625) ; R2.1 1509.5,364.5 1509.5,295.5 v1(1510,295) ; C1.2 v1(1745,1315) ; v1(2520,1315) 2520,1316.35 2521,1317.35 C9.2 ; C12.2 2683.67,1570 v1(2702.75,1589.07) ; U2.21 2879,1319 v1(2915,1355) ; v1(3050,1385) 3084,1351 U2.5 ; U2.3 3200.65,1288 3223.65,1265 v1(3225,1265) ; C8.1 v1(3135,1865) ; v1(3240,1570) 3240.16,1570.16 3330.91,1570.16 Y2.2 ; Y2.4 3435.53,1494.47 3509.47,1494.47 v1(3510,1495) ; C11.2 v1(3530,1260) ; C10.2 v1(3535,1355) ; C7.1 v1(3675,1670)
  other v1: 1305,1950 360,2910
IO0: J7.8 R4.1 R10.2 TP6.1 U2.30 | length 6073.7
  Top Layer w6: TP6.1 1440,2775 1547,2668 R4.1 1658,1878 1965,2185 1965,2391.5 1968.51,2395.01 3577.29,2395.01 3580.8,2391.5 3580.8,2290.8 J7.8 3695,2285 3793,2187 3793,2035 ; U2.30 3013.93,1076.07 3160,930 3781.49,930 3794.5,943.01 3794.5,2033.5 3793,2035 ; R10.2 3793,2035
IO1: J7.7 R5.1 R11.2 TP7.1 U2.31 | length 5509.4
  Top Layer w6: TP7.1 1405,2455 1420,2440 1420,1883 R5.1 1421,1851 1446,1826 1661,1826 2060,2225 2060,2370.49 2063.51,2374 3471.49,2374 3475,2370.49 J7.7 3475,2183.51 3478.51,2180 3607.49,2180 3611,2176.49 3611,1908.51 3614.51,1905 R11.2@3639.5,1905 ; U2.31 3045.93,1089.07 3170,965 3745,965 3778.5,998.5 3778.5,1810.5 3684,1905 R11.2
IO2: J7.6 U2.32 | length 2407.8
  Top Layer w6: U2.32 3076.93,1093.07 3175,995 3705,995 3762.5,1052.5 3762.5,1754.75 3712.25,1805 3598.51,1805 3595,1808.51 3595,2136.49 3591.49,2140 3378.51,2140 3375,2143.51 J7.6
IO3: J7.5 U2.1 | length 2166.6
  Top Layer w6: U2.1 3190,1225 3290,1125 3655,1125 3746.5,1216.5 3746.5,1748.13 3724.63,1770 3365.35,1770 3275,1860.35 J7.5
IO4: J7.4 U2.2 | length 2173.8
  Top Layer w6: U2.2 3189,1256 3304,1141 3636,1141 3730.5,1235.5 3730.5,1741.5 3718,1754 3358.72,1754 3256,1856.72 3256,2204 J7.4
IO5: J7.3 U2.9 | length 782.3
  Top Layer w6: J7.3 3075,1505.43 U2.9
IO6: J7.2 U2.10 | length 810.9
  Top Layer w6: J7.2 3045.93,2214.07 U2.10
IO7: J7.1 U2.11 | length 839
  Top Layer w6: J7.1 3013.93,2146.07 U2.11
IO8: J5.10 U2.12 | length 892.5
  Top Layer w6: J5.10 2982.93,2017.07 U2.12
IO9: J5.9 U2.13 | length 920.6
  Top Layer w6: J5.9 2950.93,1949.07 U2.13
MISO: J5.6 J10.1 U2.16 | length 1398.6
  Top Layer w6: J5.6 2315,1991.16 2230,1906.16 J10.1 2780,1850 2856.93,1773.07 U2.16
MOSI: J5.7 J10.5 U2.15 | length 1796.1
  Top Layer w6: J10.5 2182,1802 2182,1902 2272,1992 2272,2324.49 2275.51,2328 2411.49,2328 2415,2324.49 J5.7 2887.93,1812.07 U2.15
NetC4_1: C4.1 U1.4 | length 221.2
  Top Layer w6: C4.1 1305,1764 U1.4
NetC12_1: C12.1 L1.1 U2.18 | length 866.7
  Top Layer w20: L1.1 2461.72,1240 2450,1251.72 2450,1558.28 2461.72,1570 C12.1 2521,1491.72 2532.72,1480 2688.28,1480 2700,1468.28 2700,1425.72 2711.72,1414 U2.18
NetLED1_2: LED1.2 R9.1 | length 87
  Top Layer w6: LED1.2 R9.1
NetLED2_2: LED2.2 R3.2 | length 172
  Top Layer w6: R3.2 LED2.2
NetLED3_2: LED3.2 R2.2 | length 222.2
  Top Layer w6: R2.2 1391,414 1402,425 1491.49,425 1495,428.51 1495,486 LED3.2
NetLED4_2: LED4.2 R10.1 | length 203
  Top Layer w6: LED4.2 R10.1
NetLED5_2: LED5.2 R11.1 | length 196.5
  Top Layer w6: LED5.2 R11.1
NetR1_1: R1.1 SW1.2 TP10.1 | length 564.3
  Top Layer w20: SW1.2 444,1455 460,1471 460,1504 490,1534 R1.1 555,1633.28 543.28,1645 511.72,1645 500,1656.72 TP10.1
NetR4_2: R4.2 U1.2 | length 346.1
  Top Layer w6: U1.2 1405,1646.14 1416.72,1657.86 1543.49,1657.86 1547,1661.37 R4.2
NetR5_2: R5.2 U1.3 | length 275
  Top Layer w6: U1.3 1355,1675.14 1362.86,1683 1415.14,1683 1421,1688.86 R5.2
RESET: C13.2 C14.2 J3.3 J10.3 R8.1 SW3.1 SW3.2 U2.29 | length 10269.8
  Top Layer w6: SW3.2 SW3.1 440.49,2713 444,2716.51 444,2783 452,2791 C13.2 543,2790 C14.2 820,2790 890,2720 890,2213.51 893.51,2210 1280,2210 1360,2130 1360,1845 1395,1810 1840,1810 1876.49,1846.49 ; J10.3 2026.49,1846.49 1876.49,1846.49 ; U2.29 2982.93,1084.44 3512.37,555 3550,555 v2(3555,560) ; v2(3710,210) 3060,210 2980,290 2600,290 2538.42,351.58 2537.83,352.17 2532.87,376.37 cw(c2575,385) 2535.03,400.86 ccw(c2529.44,403.04) 2535.25,404.55 ccw(c2432.59,377.44) 2527.67,424.7 ccw(c2522.31,422) 2522.57,427.99 2522.44,428 2522.31,428 2457.19,428 2446.44,417.25 2392.93,417.25 2375,399.32 J3.3 2280,290 1980,290 1950,320 1950,511.49 1953.51,515 2150,515 2214,579 R8.1 2214,786.49 2210.49,790 1538.51,790 1535,793.51 1535,1041.49 1538.51,1045 1705,1045 1710,1040 1710,883.51 1713.51,880 2376.49,880 2380,883.51 2380,1505 2360,1525 1880,1525 1876.49,1528.51 1876.49,1846.49
  Bottom Layer w6: v2(3555,560) 3630,560 3705,485 3705,215 v2(3710,210)
SCK: J5.5 J10.2 U2.17 | length 1608.2
  Top Layer w6: J5.5 2215,1970 2139,1894 2139,1859 2080.08,1800.08 2080.08,1701.84 2083.59,1698.33 2792.98,1698.33 2796.5,1694.81 U2.17
SCL/A5: J5.1 J9.6 TP9.1 U2.28 | length 6332.7
  Top Layer w6: J5.1 1740,2285 1680,2345 1680,2876.49 1683.51,2880 2131.49,2880 2135,2876.49 2135,2673.51 2138.51,2670 2776.49,2670 2780,2666.49 2780,2468.51 2783.51,2465 3700,2465 3810.5,2354.5 3810.5,666.76 3634.07,490.33 3564.67,490.33 3564.67,480.08 ; U2.28 2950.93,1093.82 3564.67,480.08 ; J9.6 3564.67,395.33 3564.67,480.08
SDA/A4: J5.2 J9.5 TP8.1 U2.27 | length 7393.3
  Top Layer w6: J5.2 1915,2225 1900,2210 1645,2210 1643.49,2208.49 1638.51,2208.49 1635,2212 1635,2961.49 1638.51,2965 2646.49,2965 2650,2961.49 TP8.1 2688.62,2726.38 2801.49,2726.38 2805,2722.86 2805,2508.51 2808.51,2505 3720,2505 3830,2395 3830,263.51 3826.49,260 3478.51,260 3475,263.51 J9.5 3475,535 2919.93,1090.07 U2.27
SS: J5.8 U2.14 | length 949.2
  Top Layer w6: J5.8 2919.93,1880.07 U2.14
USB_VCC: D1.5 J1.1 LED1.1 SW1.3 | length 1882.6
  Top Layer w20: SW1.3 250,1555 130,1675 130,1880 185,1935 185,2297.62 196.72,2309.34 276.93,2309.34 283.85,2302.42 301.04,2302.42 J1.1 451.49,2297.2 466,2311.72 466,2341.02 ; LED1.1 477.72,2478 466,2466.28 466,2341.02 ; D1.5 748.28,2255 768,2274.72 768,2341.02 756.28,2352.74 477.72,2352.74 466,2341.02
UXTAL1: C5.2 R6.1 U1.7 Y1.1 | length 947.6
  Top Layer w6: R6.1 800,1961 C5.2 1039.11,1966 1044.97,1960.14 Y1.1 1148.14,1872.16 1154,1866.3 1154,1548 U1.7
UXTAL2: C6.2 R6.2 U1.8 Y1.3 | length 798.8
  Top Layer w6: R6.2 682,1709 692,1699 789,1699 799,1689 C6.2 922,1619 ; Y1.3 941.03,1638.03 922,1619 ; U1.8 994,1547 922,1619
XTAL1: C7.2 R7.1 U2.7 Y2.1 | length 966.4
  Top Layer w6: U2.7 3561.49,1414 3565,1417.51 3565,1566.8 3561.49,1570.32 Y2.1 3435,1670 ; R7.1 3435,1670 ; C7.2 3435,1670
XTAL2: C8.2 R7.2 U2.8 Y2.3 | length 586.2
  Top Layer w6: R7.2 3222,1678 3143,1678 C8.2 3133.5,1684.5 U2.8 3325,1445 3330,1450 3330,1492.87 Y2.3
pads on no net: D1.4 D1.6 J1.4 J3.1 U1.9 U1.10 U1.11 U1.12 U1.14 U1.15 U2.19 U2.22

## Polygon pours and split planes (outlines as drawn)
GND on Bottom Layer "NONET_L-01_P-001" (solid, pour order 0): 0,3000 0,0 3900,0 3900,3000

## Keep-outs
Keep-Out Layer:
  the board outline again, w10

## Silkscreen, mask and mechanical layers (free items; w line width, h text height)
Top Overlay:
  text "IO0/TX" at 1170,2910 h40
  text "SCL" at 1970,2900 h40
  text "SDA" at 2475,2900 h40
  text "ECEN 5730 Board 3" at 2795,2870 h60
  text "IBRAHIM MUADH" at 2925,2770 h60
  text "22nd  Oct 2025" at 2875,2670 h60
  text "IO1/RX" at 1185,2595 h40
  text "USB_Sen" at 295,1981.66 h40
  text "D-" at 1865,1401 h40
  text "5V_USB" at 260,1201.66 h40
  text "D+" at 1819,1102 h40
  text "5V" at 140,80 h40
  text "3.3V" at 1020,70 h40

## Text inside footprints (layer, text, board x,y; h text height)
J3: Top Overlay "NC" at 2175,472.07 h30 r45; Top Overlay "IOREF" at 2265,463.39 h30 r45; Top Overlay "3v3" at 2475,472.07 h30 r45; Top Overlay "5v" at 2575,472.07 h30 r45; Top Overlay "GND" at 2675,472.07 h30 r45; Top Overlay "GND" at 2775,472.07 h30 r45; Top Overlay "Vin" at 2875,472.07 h30 r45; Top Overlay "RESET" at 2375,472.07 h30 r45
J5: Top Overlay "SCL" at 1786,2128.21 h30 r45; Top Overlay "SDA" at 1878,2128.21 h30 r45; Top Overlay "AREF" at 1954,2107 h30 r45; Top Overlay "GND" at 2081,2128.21 h30 r45; Top Overlay "D13" at 2187,2131.74 h30 r45; Top Overlay "D12" at 2278,2131.74 h30 r45; Top Overlay "D11~" at 2371,2110.53 h30 r45; Top Overlay "D10~" at 2472,2107 h30 r45; Top Overlay "D9~" at 2581,2124.67 h30 r45; Top Overlay "D8" at 2704,2149.41 h30 r45
J7: Top Overlay "D5~" at 3056,2127.07 h30 r45; Top Overlay "D0" at 3556,2151.81 h30 r45; Top Overlay "D1" at 3466,2160 h30 r45; Top Overlay "D2" at 3359,2152 h30 r45; Top Overlay "D3~" at 3246,2130 h30 r45; Top Overlay "D4" at 3162,2150 h30 r45; Top Overlay "D6~" at 2946,2127.07 h30 r45; Top Overlay "D7" at 2856,2151.81 h30 r45
J9: Top Overlay "A1" at 3173,457 h30 r45; Top Overlay "A0" at 3073,457 h30 r45; Top Overlay "A2" at 3273,454.07 h30 r45; Top Overlay "A3" at 3373,454.07 h30 r45; Top Overlay "A4" at 3473,454.07 h30 r45; Top Overlay "A5" at 3573,454.07 h30 r45